# Altium PCB PCB_lm12to5.PcbDoc
Units mm, origin at the board's own origin, x right, y up, seen from the top; angles counter-clockwise.
Board outline 38.35 x 28.7 mm, 2 copper layers (Top Layer, Bottom Layer); 5 components, 4 nets, 18 pads, 1 vias.
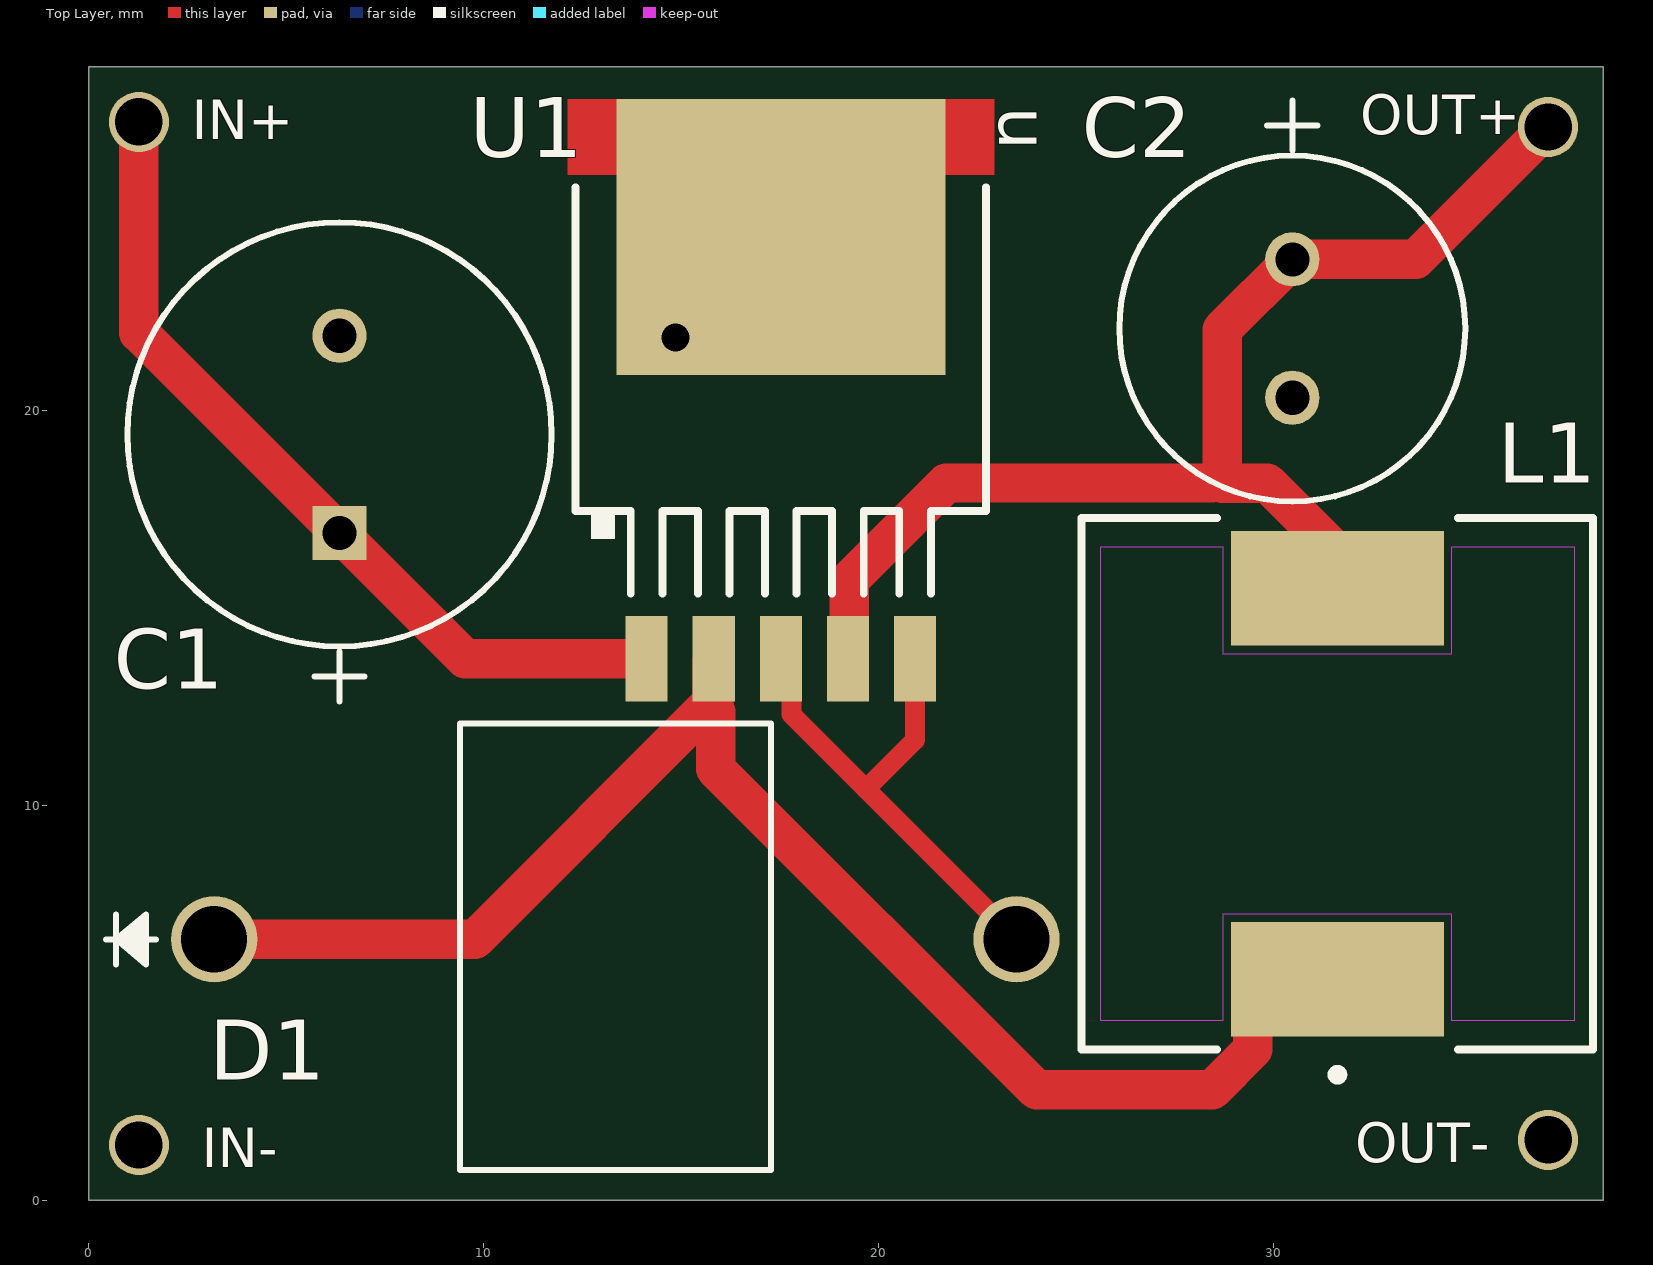
[diagram p0: Top Layer view]
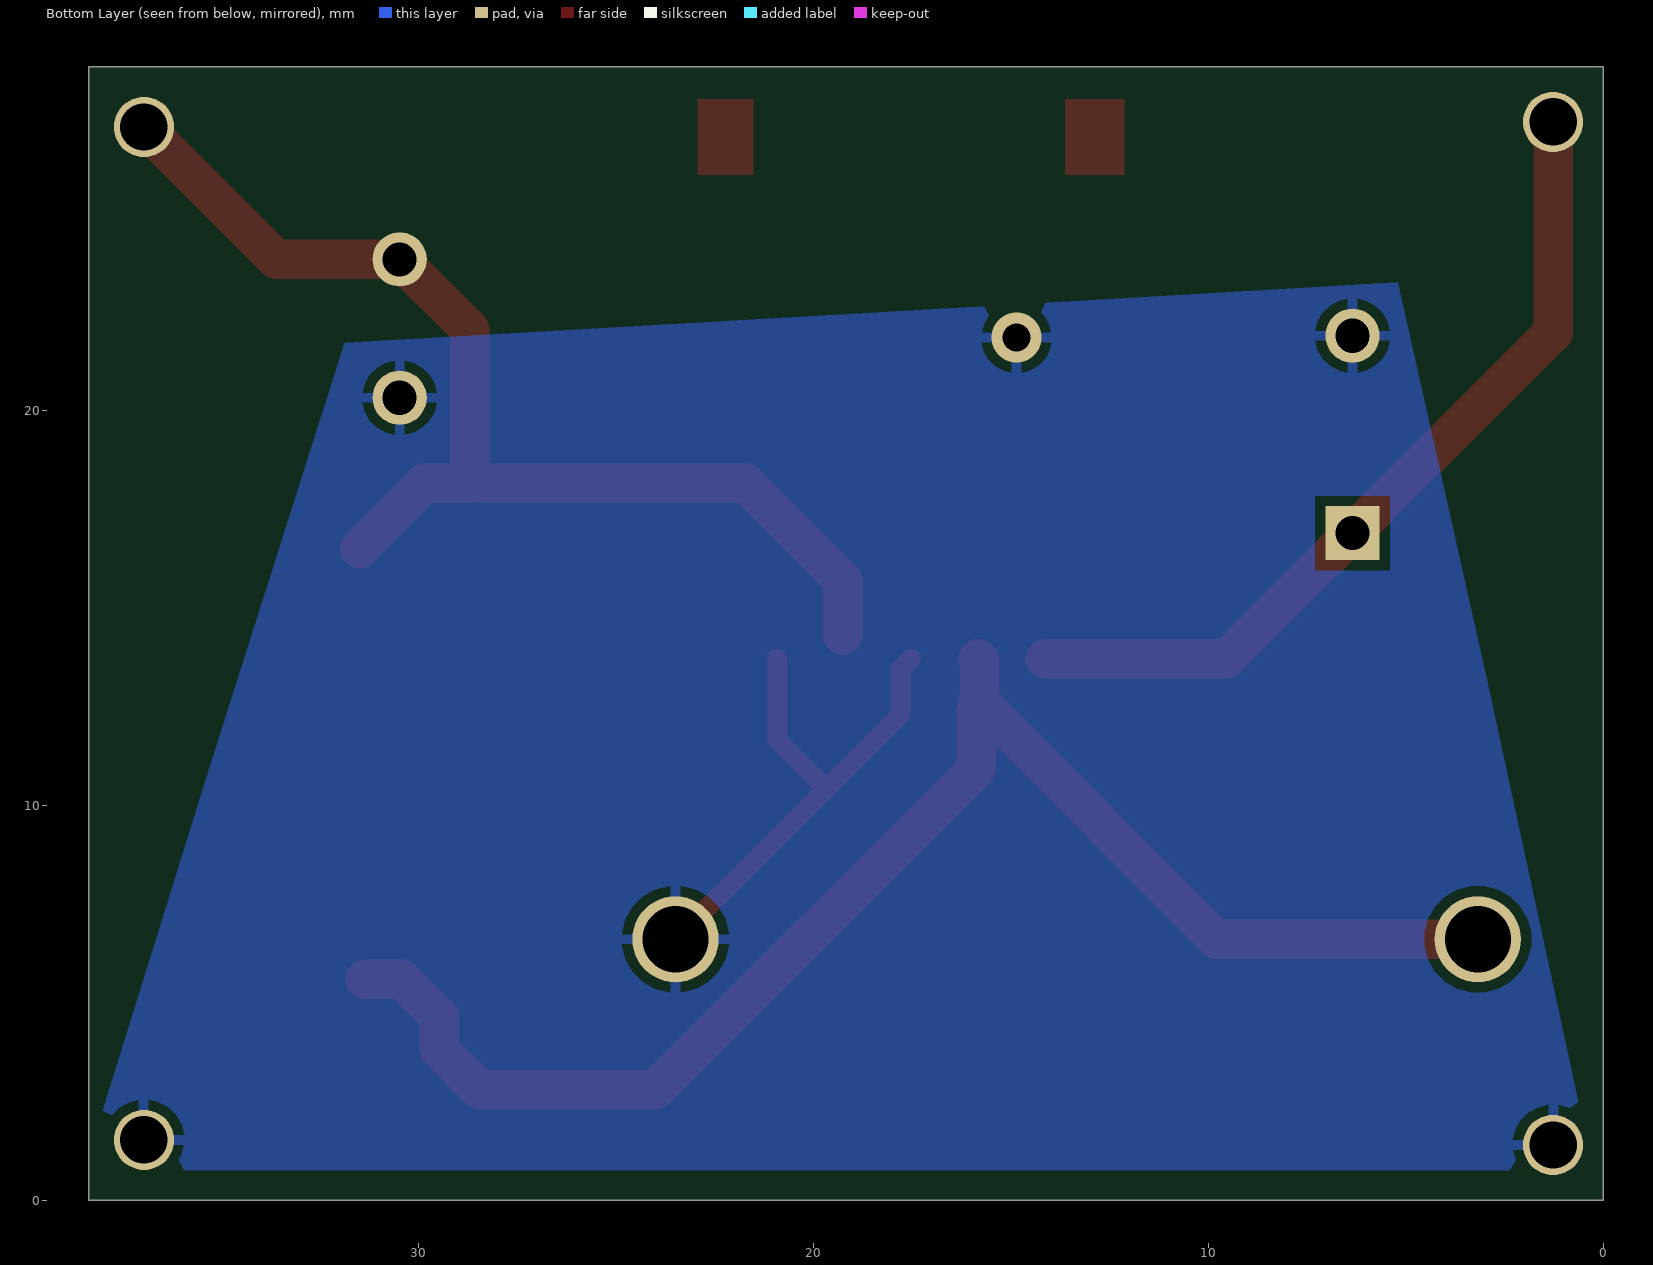
[diagram p1: Bottom Layer view, seen from below]

## Layer stack, top to bottom
Top Solder: solder mask 0.0102, Solder Resist, Dk 3.5
Top Layer: signal copper 0.0356
Dielectric 1: dielectric 0.32, FR-4, Dk 4.8
Bottom Layer: signal copper 0.0356
Bottom Solder: solder mask 0.0102, Solder Resist, Dk 3.5

## Board outline
0,0 38.354,0 38.354,28.702 0,28.702

## Design rules (kind name [scope] priority, off if disabled: settings)
Clearance [All] p1: gap=0.254 ignorepadtopadclearanceinfootprint=FALSE
PolygonConnect [All] p1: connectstyle=Relief reliefconductorwidth=0.254 reliefentries=4 polygonreliefangle="90 Angle" airgapwidth=0.254
RoutingVias [All] p1: holewidth=0.711 width=1.27 viastyle="Through Hole" minholewidth=0.711 minwidth=1.27 maxholewidth=0.711 maxwidth=1.27
SolderMaskExpansion [All] p1: expansion=0.102 istentingtop=FALSE
SupplyNets "Schematic Supply Nets_1" [InNet('+12V VIN')] p1: voltage=0.000
SupplyNets "Schematic Supply Nets" [InNet('GND')] p2: voltage=0.000
Width [All] p1: maxlimit=1.2 minlimit=0.254 preferedwidth=1
30 further rules are at their usual default settings.

## Components (designator, comment, footprint, x,y, rotation, side; value= is the part's Value field where it differs from the comment)
C1 "680UF" ESY687M025AH4AA 6.35,19.304 r90 top
C2 "220UF" 35ZLJ220M8X16 30.48,23.825 r270 top
D1 "1N5823" DIODE_1N5823_SSM -15.367,6.604 r0 top
L1 "33UH" 7447706330 31.623,10.541 r90 top
U1 "LM2596S-5.0/NOPB" LM2596 17.526,19.05 r270 top

## Footprints (in the part's own frame and the unit in brackets; to place one, negate y for a bottom-side part, rotate by r counter-clockwise, add the part's x,y. Pads: shape width x height; smd on the part's side, far side on the other; paste and mask are expansions set on the pad)
35ZLJ220M8X16 [mil]
  round 54 hole 34 paste-99999 mask+0: 1(0,0) 2(138,0)
  silkscreen extent -158,-172 242,172, body extent -99,-167 238,167, height 690
7447706330 [mm] "SMT Shielded Power Inductor, 2-leads, body 12x12mm"
  rect 2.9x5.4 smd: 1(-4.95,0) 2(4.95,0)
  Top Layer keep-out region: -6,-6 -6,-2.9 -3.3,-2.9 -3.3,2.9 -6,2.9 -6,6 6,6 6,2.9 3.3,2.9 3.3,-2.9 6,-2.9 6,-6
  silkscreen extent -7.49,-6.48 6.73,6.48, body extent -6.14,-5.99 6.01,6.01, height 5.75
DIODE_1N5823_SSM [mil]
  round 86 / inner round 60 / far side round 86 hole 66 paste-99999 mask+0: 1(730,0) 2(1530,0)
  silkscreen extent 622,-230 1285,215, body extent 700,-225 1559,225, height 450
ESY687M025AH4AA [mil] "CAP ALUM 680UF 20% 25V RADIAL TH"
  rect 54x54 / inner round 60 / far side rect 54x54 hole 34 paste-99999 mask+0: 1(-95,0)
  round 54 / inner round 60 / far side round 54 hole 34 paste-99999 mask+0: 2(101.85,0)
  silkscreen extent -263,-212 215,212, body extent -203,-206 211,206, height 857
LM2596 [mm]
  rect 2.16x1.07 smd paste-0.102 mask+0.051: 1(5.338,-3.4) 2(5.338,-1.7) 3(5.338,0.005) 4(5.338,1.7) 5(5.338,3.4)
  rect 6.99x8.33 smd paste-0.102 mask+0.051: 6(-5.338,0)
  Top Layer region: -8.832,-3.9 -8.832,-5.4 -6.923,-5.4 -6.923,-3.9
  Top Layer region: -8.832,5.4 -8.832,4 -6.923,4 -6.923,5.4
  silkscreen extent -6.6,-5.2 3.68,5.2, body extent -8.17,-5.08 6.13,5.08, height 4.58

## Part data
C1: library part ESY687M025AH4AA, "CAP ALUM 680UF 20% 25V RADIAL TH"
C2: library part 35ZLJ220M8X16, "CAP ALUM 220UF 20% 35V RADIAL TH"
D1: "DIODE SCHOTTKY 20V 5A AXIAL"
L1: library part 7447706330, "FIXED IND 33UH 3A 60 MOHM SMD"
U1: library part LM2596S-5.0NOPB, "SIMPLE SWITCHER&reg; 4.5V to 40V, 3A Low Component Count Step-Down Regulator 5-DDPAK/TO-263", Alternate_PartNumber=LM2596S-ADJ/NOPB, Manufacturer="Texas Instruments", PartNumber=LM2596SX-ADJ/NOPB, CompType=IC, Copyright="Copyright (C) 2025 Ultra Librarian. All rights reserved.", Manufacturer_Name="Texas Instruments", Manufacturer_Part_Number=LM2596S-5.0/NOPB, MountType=SMT, PackageReference=KTT0005B, RefDes=RefDes, RoHS=Y, TYPE=TYPE

## Free pads (board coordinates)
  round 1.524 hole 1.2: IN+(1.27,27.305) IN-(1.27,1.397) OUT+(36.957,27.178) OUT_(36.957,1.524)

## Via types
v1: diameter 1.27, hole 0.711, Top Layer to Bottom Layer, 1 vias

## Nets (pads, with @x,y where several pads share a name; then routed paths per layer and width w, separated by ;. In a path a pad name is that pad's centre, name@x,y a point inside that pad or via, vN(x,y) a via of type N, cw(c..) or ccw(c..) an arc to the next point about the centre after c; other vN are vias at no path point)
"+5V VOUT": C2.1 L1.2 pad.OUT+ U1.4 | length 29.4
  Top Layer w0.254: U1.4@19.253,14.3 U1.4@19.261,14.292
  Top Layer w1: U1.4@19.253,14.3 19.253,15.697 21.717,18.161 28.439,18.161 ; L1.2@31.496,16.51 29.848,18.158 28.702,18.158 28.702,22.047 C2.1 33.604,23.825 pad.OUT+
"+12V VIN": C1.1 pad.IN+ U1.1 | length 21.6
  Top Layer w1: pad.IN+ 1.27,21.971 C1.1 9.529,13.712 U1.1
GND: C1.2 C2.2 D1.2 pad.IN- pad.OUT_ U1.3 U1.5 U1.6 | length 13.4
  Top Layer w0.5: U1.3 17.797,13.447 17.797,12.302 19.685,10.414 ; U1.5 20.926,11.655 19.685,10.414 ; D1.2 19.685,10.414
  other v1: 14.859,21.844
NetD1_1: D1.1 L1.1 U1.2 | length 38.1
  Top Layer w1: D1.1 9.779,6.604 15.709,12.534 U1.2@15.826,12.651 ; U1.2@15.791,12.77 15.791,13.678 U1.2 ; 15.875,12.368 15.875,10.922 24.003,2.794 28.456,2.794 29.477,3.815 29.477,4.641 30.427,5.591 L1.1@31.369,5.591

## Polygon pours and split planes (outlines as drawn)
GND on Bottom Layer "GND_L02_P000" (solid, pour order 0): 0.254,0.762 37.465,0.762 38.227,1.524 35.306,10.922 31.877,21.717 5.207,23.241 2.921,13.081

## Silkscreen, mask and mechanical layers (free items; w line width, h text height)
Top Overlay:
  text "OUT+" at 32.204,26.997 h1
  text "IN+" at 2.613,26.87 h1
  text "OUT-" at 32.077,0.962 h1
  text "IN-" at 2.867,0.835 h1

## Text inside footprints (layer, text, board x,y; h text height)
C1: Mechanical 13 "RefDes2" at 6.985,17.169 h1.27 r90
D1: Mechanical 13 "RefDes2" at 11.112,5.969 h1.27
U1: Top Overlay "u" at 23.063,27.686 h1.27 r270